# Altium PCB JLink-OB-072-Wiki.PcbDoc
Units mm, origin at the board's own origin, x right, y up, seen from the top; angles counter-clockwise.
Board outline 33.15 x 33.02 mm, 2 copper layers (Top Layer, Bottom Layer); 45 components, 32 nets, 169 pads, 75 vias.
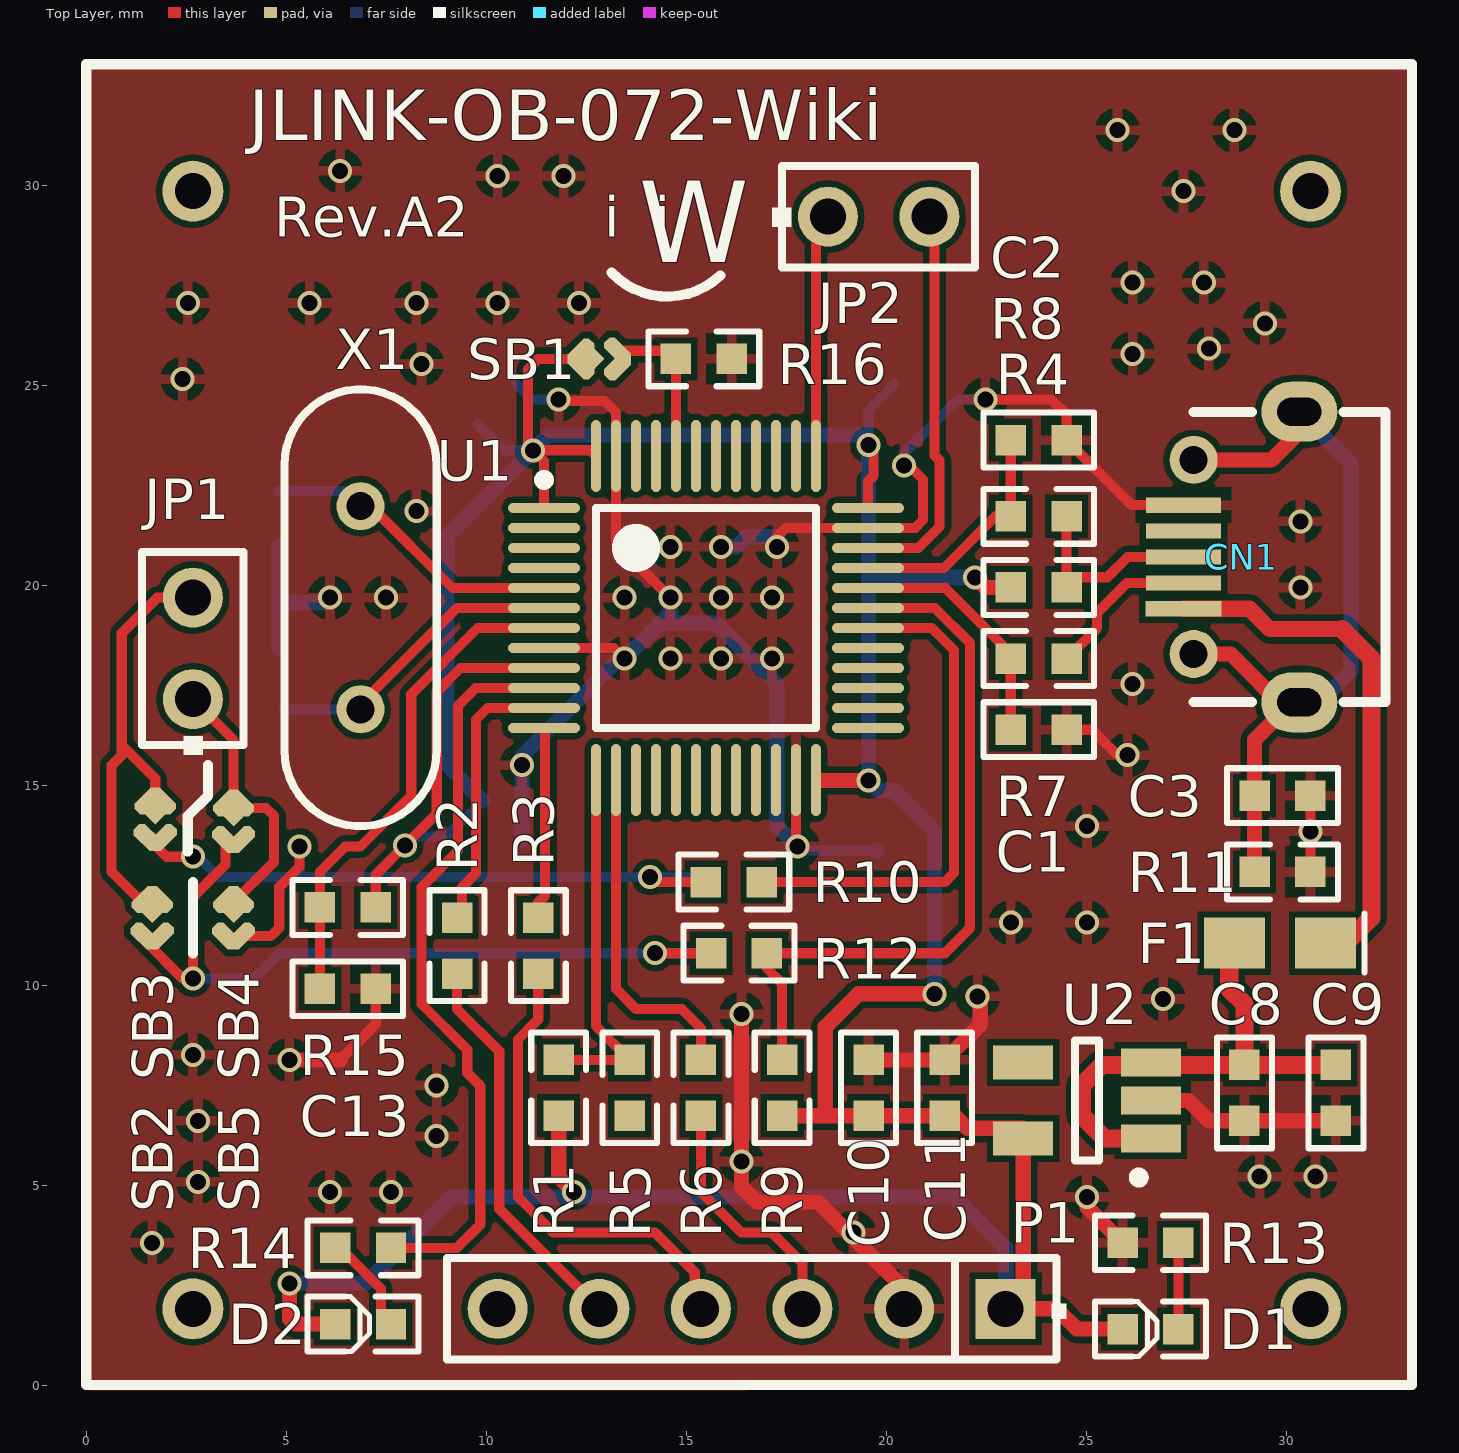
[diagram p0: Top Layer view]
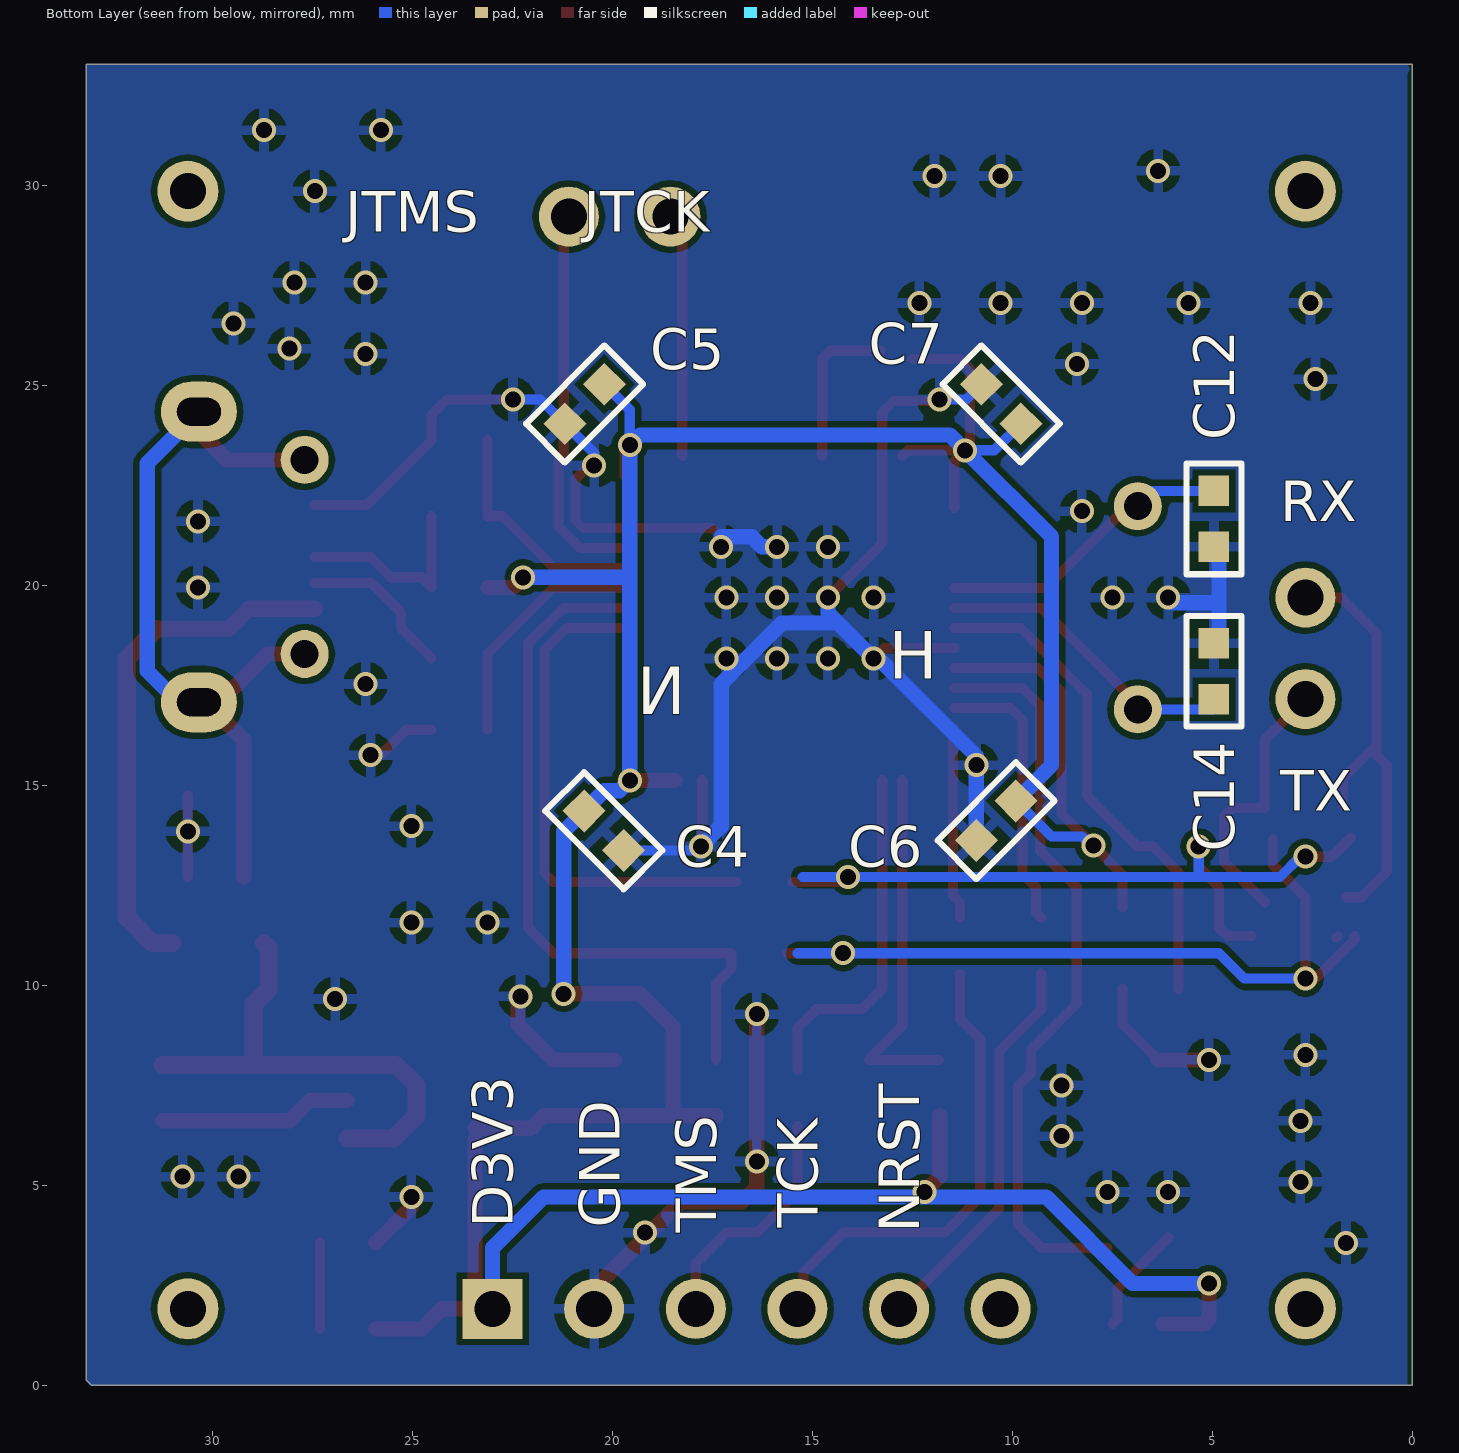
[diagram p1: Bottom Layer view, seen from below]

## Layer stack, top to bottom
Top Solder: solder mask 0.0102, Solder Resist, Dk 3.5
Top Layer: signal copper 0.0356
Dielectric1: dielectric 0.32, FR-4, Dk 4.8
Bottom Layer: signal copper 0.0356
Bottom Solder: solder mask 0.0102, Solder Resist, Dk 3.5

## Board outline
0,33.02 33.147,33.02 33.147,0.127 33.02,0 0,0

## Design rules (kind name [scope] priority, off if disabled: settings)
Clearance [All] p1: gap=0.152
PolygonConnect [All] p1: connectstyle=Relief reliefconductorwidth=0.254 reliefentries=4 polygonreliefangle="90 Angle" airgapwidth=0.254
RoomDefinition JLink-OB-072-Wiki [InComponentClass('JLink-OB-072-Wiki')] p1: confinementstyle=ConfineIn formatcopy=TRUE lockcomponents=FALSE outline 0,0 33.147,0 33.147,33.02 0,33.02
RoutingCorners [All] p1: cornerstyle=Round minsetback=2.54 maxsetback=2.54
RoutingVias [All] p1: holewidth=0.4 width=0.6 viastyle="Through Hole" minholewidth=0.4 minwidth=0.6 maxholewidth=0.4 maxwidth=0.6
SolderMaskExpansion [All] p1: expansion=0.102
Width [All] p1: maxlimit=1.27 minlimit=0.203 preferedwidth=0.254
29 further rules are at their usual default settings.

## Components (designator, comment, footprint, x,y, rotation, side; value= is the part's Value field where it differs from the comment)
C1 "Cap_0603" 0603C 24.511,16.383 r180 top
C2 "Cap_0603" 0603C 24.511,23.622 r180 top
C3 "Cap_0603" 0603C 30.607,14.732 r180 top
C4 "Cap_0603" 0603C 20.701,14.351 r225 bottom
C5 "Cap_0603" 0603C 20.193,25.019 r315 bottom
C6 "Cap_0603" 0603C 9.906,14.605 r315 bottom
C7 "Cap_0603" 0603C 9.779,24.031 r45 bottom
C8 "1uF" 0603C 28.956,6.604 r90 top
C9 "100nF" 0603C 31.242,6.604 r90 top
C10 "100nF" 0603C 19.558,8.128 r270 top
C11 "1uF" 0603C 21.463,6.731 r90 top
C12 "Cap_0603" 0603C 4.953,22.352 r270 bottom
C13 "Cap_0603" 0603C 5.842,9.906 r0 top
C14 "Cap_0603" 0603C 4.953,17.145 r90 bottom
CN1 "USB-Micro" USB_MICRO_5S_B-2 27.686,20.701 r270 top
D1 "LED_0603" LED-0603 25.908,1.397 r0 top
D2 "LED_0603" LED-0603 6.223,1.524 r0 top
F1 "500mA" 0805M 30.988,11.049 r180 top
JP1 "JP2" HDR1X2/2.54mm 2.667,17.145 r90 top
JP2 "JP2" HDR1X2/2.54mm 18.542,29.21 r0 top
P1 "Synio Power Header 6 Pin" HDR1X6/2.54MM 22.987,1.905 r180 top
R1 "Res_0603" 0603R 11.811,8.128 r270 top
R2 "Res_0603" 0603R 9.271,10.287 r90 top
R3 "Res_0603" 0603R 11.303,10.287 r90 top
R4 "Res_0603" 0603R 24.511,19.939 r180 top
R5 "Res_0603" 0603R 13.589,6.731 r90 top
R6 "Res_0603" 0603R 15.367,6.731 r90 top
R7 "Res_0603" 0603R 24.511,18.161 r180 top
R8 "Res_0603" 0603R 24.511,21.717 r180 top
R9 "Res_0603" 0603R 17.399,8.128 r270 top
R10 "Res_0603" 0603R 15.494,12.573 r0 top
R11 "Res_0603" 0603R 30.607,12.827 r180 top
R12 "Res_0603" 0603R 15.621,10.795 r0 top
R13 "Res_0603" 0603R 25.908,3.556 r0 top
R14 "Res_0603" 0603R 7.62,3.429 r180 top
R15 "Res_0603" 0603R 5.842,11.938 r0 top
R16 "Res_0603" 0603R 14.744,25.654 r0 top
SB1 "Circuit Breaker" JP2_SMD 12.827,25.654 r180 top
SB2 "Circuit Breaker" JP2_SMD 1.651,11.684 r90 top
SB3 "Circuit Breaker" JP2_SMD 1.727,14.148 r90 top
SB4 "Circuit Breaker" JP2_SMD 3.683,14.097 r90 top
SB5 "Circuit Breaker" JP2_SMD 3.683,11.684 r90 top
U1 "STM32F103C" LQFP48_N 15.494,19.177 r0 top
U2 "LDO" SOT23-5 25.019,7.112 r180 top
X1 "XTAL_5032_2P" XTAL 6.858,19.431 r90 top

## Footprints (in the part's own frame and the unit in brackets; to place one, negate y for a bottom-side part, rotate by r counter-clockwise, add the part's x,y. Pads: shape width x height; smd on the part's side, far side on the other; paste and mask are expansions set on the pad)
0603C [mil]
  rect 30x30 smd: 1(0,0) 2(55,0)
  silkscreen extent -27,-27 82,27, body extent -4,-16 59,16, height 12
0603R [mil]
  rect 30x30 smd: 1(0,0) 2(55,0)
  silkscreen extent -27,-27 82,27, body extent -4,-18 58,16, height 18
0805M [mil]
  rect 60x50 smd: 1(0,0) 2(90,0)
  silkscreen extent -38,-29 -38,29
HDR1X2/2.54mm [mm]
  round 1.5 hole 0.9: 1(0,0) 2(2.54,0)
  silkscreen extent -1.4,-1.27 3.68,1.27, body extent -1.29,-1.5 3.79,1.42, height 8.51
HDR1X6/2.54MM [mm] "Connector; Header; 6 Position"
  rect 1.5x1.5 hole 0.9: 1(0,0)
  round 1.5 hole 0.9: 2(2.54,0) 3(5.08,0) 4(7.62,0) 5(10.16,0) 6(12.7,0)
  silkscreen extent -1.52,-1.27 13.97,1.27, body extent -1.32,-1.5 13.92,1.42, height 8.51
JP2_SMD [mil]
  oct 15x30 smd rot 45: 1(-18,-8) 2(18,7)
  oct 15.75x30 smd rot 135: 1(-18,8)
  rect 26x26 smd rot 45: 2(13,0)
  oct 15x30 smd rot 135: 2(18,-7)
LED-0603 [mil]
  rect 30x30 smd: 1(0,0) 2(55,0)
  silkscreen extent -27,-27 82,27, body extent -6,-14 58,17, height 24
LQFP48_N [mm] "Thin QFP, 48-Leads, Body 7x7mm, Pitch 0.5mm, IPC Medium Density"
  oval 1.8x0.25 smd: 1(-4.05,2.75) 2(-4.05,2.25) 3(-4.05,1.75) 4(-4.05,1.25) 5(-4.05,0.75) 6(-4.05,0.25) 7(-4.05,-0.25) 8(-4.05,-0.75) 9(-4.05,-1.25) 10(-4.05,-1.75) 11(-4.05,-2.25) 12(-4.05,-2.75) 25(4.05,-2.75) 26(4.05,-2.25) 27(4.05,-1.75) 28(4.05,-1.25) 29(4.05,-0.75) 30(4.05,-0.25) 31(4.05,0.25) 32(4.05,0.75) 33(4.05,1.25) 34(4.05,1.75) 35(4.05,2.25) 36(4.05,2.75)
  oval 0.25x1.8 smd: 13(-2.75,-4.05) 14(-2.25,-4.05) 15(-1.75,-4.05) 16(-1.25,-4.05) 17(-0.75,-4.05) 18(-0.25,-4.05) 19(0.25,-4.05) 20(0.75,-4.05) 21(1.25,-4.05) 22(1.75,-4.05) 23(2.25,-4.05) 24(2.75,-4.05) 37(2.75,4.05) 38(2.25,4.05) 39(1.75,4.05) 40(1.25,4.05) 41(0.75,4.05) 42(0.25,4.05) 43(-0.25,4.05) 44(-0.75,4.05) 45(-1.25,4.05) 46(-1.75,4.05) 47(-2.25,4.05) 48(-2.75,4.05)
  silkscreen extent -4.17,-2.75 2.75,3.57, body extent -3.5,-3.5 3.5,3.5, height 1.6
SOT23-5 [mm] "Thin QFP, 48-Leads, Body 7x7mm, Pitch 0.5mm, IPC Medium Density"
  rect 1.5x0.7 smd: 1(-1.595,0.95) 2(-1.595,0) 3(-1.595,-0.95)
  rect 1.5x0.85 smd: 4(1.595,-0.95) 5(1.595,0.95)
  silkscreen extent -1.42,-1.5 0.3,2.05, body extent -1.39,-1.46 1.41,1.44, height 1.09
USB_MICRO_5S_B-2 [mil] "USB Micro SMT 5S Type B (JLC C10418)"
  oval 59.06x74.8 hole 27.56 slot 43.31 at 90 deg: 0(-143,104) 0(143,104)
  round 47.24 hole 27.5: 0(-95.5,0) 0(95.5,0)
  rect 15x75 smd: 1(51,-10)
  rect 15x74 smd: 2(25.5,-10) 3(0,-10) 4(-25.5,-10) 5(-51,-10)
  silkscreen extent -143,0 143,189, body extent -161,-9 161,204, height 105
XTAL [mm] "Radial Cap, Thru-Hole; 2 Leads; 0.2 in Pin Spacing"
  round 1.2 hole 0.7: 1(-2.54,0) 2(2.54,0)
  silkscreen extent -5.46,-1.91 5.46,1.91, body extent -5.33,-2.05 5.33,2.05, height 3.22

## Part data
C1 C2 C3 C4 C5 C6 C7 C12 C13 C14: "Capacitor"
C8 C9 C10 C11: library part Capacitor_ST, "Capacitor 0402 / 0603 / 0805"
D1 D2: "LED"
F1: library part Res, "Resistor"
R1 R2 R3 R4 R5 R6 R7 R8 R9 R10 R11 R12 R13 R14 R15 R16: "Resistor"
U1: "MCU"
U2: library part LDO-SOT23-5, "General LDO SOT23-5"
X1: "Crystal Oscillator"

## Free pads (board coordinates)
  round 1.524 hole 0.9: 0(2.667,29.845) 1(30.607,29.845) 2(30.607,1.905) 3(2.667,1.905)

## Via types
v1: diameter 0.6, hole 0.4, Top Layer to Bottom Layer, 75 vias

## Nets (pads, with @x,y where several pads share a name; then routed paths per layer and width w, separated by ;. In a path a pad name is that pad's centre, name@x,y a point inside that pad or via, vN(x,y) a via of type N, cw(c..) or ccw(c..) an arc to the next point about the centre after c; other vN are vias at no path point)
D3V3: C4.1 C5.1 C6.1 C7.1 C10.2 C11.1 D1.1 D2.1 P1.1 R1.2 R4.2 R9.2 R15.2 SB1.2 U1.1 U1.9 U1.24 U1.36 U1.48 U2.5 | length 105.4
  Top Layer w0.254: R15.2 7.239,12.76 v1(7.971,13.492) 8.763,14.284 8.763,17.332 9.358,17.927 U1.9 ; U1.1 11.444,23.1 v1(11.176,23.368) ; SB1.2@12.497,25.654 11.303,25.654 11.049,25.4 11.049,23.495 v1(11.176,23.368) ; U1.48 12.603,23.368 v1(11.176,23.368) ; U1.36 19.544,22.592 19.685,22.733 19.685,23.368 v1(19.558,23.495)
  Top Layer w0.381: v1(5.08,2.54) 5.08,1.651 5.207,1.524 D2.1 ; R1.2 11.811,5.207 v1(12.192,4.826) ; R9.2 18.479,6.731 ; 18.415,15.113 v1(19.558,15.113) ; v1(21.209,9.779) 19.304,9.779 18.479,8.954 18.479,6.731 ; v1(22.225,20.193) 22.479,19.939 R4.2 ; U2.5 23.424,2.342 P1.1 24.257,1.905 24.765,1.397 D1.1 ; U2.5@23.424,6.416 22.032,6.416 21.717,6.731 C10.2 18.479,6.731
  Bottom Layer w0.254: v1(7.971,13.492) 8.001,13.462 8.255,13.716 9.017,13.716 C6.1 ; C7.1 10.442,23.368 v1(11.176,23.368) ; v1(19.558,23.495) 19.558,24.384 C5.1
  Bottom Layer w0.381: v1(5.08,2.54) 6.985,2.54 9.144,4.699 v1@12.192,4.699 ; C6.1 9.017,15.494 9.017,21.209 v1(11.176,23.368) 11.557,23.749 19.304,23.749 v1(19.558,23.495) 19.558,20.193 ; v1(12.192,4.826) v1@12.192,4.699 ; v1(21.209,9.779) 21.209,13.843 C4.1 20.193,14.859 19.812,14.859 v1(19.558,15.113) 19.558,20.193 ; v1(22.225,20.193) 19.558,20.193 ; P1.1@22.987,2.032 22.987,3.429 21.717,4.699 v1@12.192,4.699
DM: C1.2 R7.2 U1.32 | length 6.2
  Top Layer w0.254: U1.32 21.451,19.927 21.463,19.939 23.114,18.288 R7.2 C1.2
DP: C2.2 R8.2 U1.33 | length 6
  Top Layer w0.254: U1.33 21.443,20.427 22.733,21.717 R8.2 C2.2
GND: C1.1 C2.1 C3.1 C4.2 C5.2 C6.2 C7.2 C8.1 C9.1 C10.1 C11.2 C12.2 C13.2 C14.2 CN1.5 P1.2 R11.1 R13.1 R16.2 U1.8 U1.23 U1.35 U1.47 U2.2 | length 76.8
  Top Layer w0.254: 6.35,8.128 7.239,9.017 C13.2 ; U1.8 13.196,18.427 v1(13.462,18.161) ; v1(11.811,24.638) 11.811,24.765 11.974,24.602 12.954,24.602 13.244,24.312 U1.47 13.244,21.046 v1(14.605,19.685) ; v1@17.272,21.209 17.49,21.427 U1.35 20.725,21.427 20.922,21.623 20.922,22.639 20.447,23.114 v1(20.447,22.987) ; U1.23 17.744,13.498 v1(17.78,13.462) ; v1(22.479,24.638) 24.13,24.638 24.511,24.257 C2.1 26.137,21.996 CN1.5 ; C1.1 25.146,16.383 25.781,15.748 v1(26.035,15.748) ; R11.1@30.607,12.7 v1(30.607,13.843) C3.1
  Top Layer w0.381: v1(5.08,8.128) 6.35,8.128 ; v1(16.383,9.271) 16.383,4.953 16.764,4.572 18.288,4.572 20.447,2.413 P1.2 ; 19.939,8.128 C11.2 22.352,9.017 22.352,9.652 v1(22.289,9.716) v1@22.162,9.716 ; v1(25.019,4.699) 25.019,4.445 R13.1 ; U2.2 27.559,7.112 28.067,6.604 C8.1 C9.1
  Bottom Layer w0.254: C7.2 11.148,24.638 v1(11.811,24.638) ; v1(17.78,13.462) 17.879,13.363 C4.2 ; v1(20.447,22.987) 20.447,23.297 C5.2 21.788,24.638 v1(22.479,24.638)
  Bottom Layer w0.381: C14.2@4.826,18.415 4.826,19.558 ; C12.2@4.826,20.955 4.826,19.558 ; v1(6.096,19.685) 5.969,19.558 4.826,19.558 ; C6.2 10.894,15.72 13.335,18.161 v1(13.462,18.161) 14.351,19.05 ; v1(14.605,19.685) 14.605,19.304 14.351,19.05 ; v1@16.002,20.955 16.256,20.955 16.51,21.209 v1@17.272,21.209 ; v1(17.78,13.462) 17.272,13.97 17.272,17.526 15.748,19.05 14.351,19.05 ; C4.2 C4.2@19.784,13.363
  other v1: 1.651,3.556 19.177,3.81 6.096,4.826 7.62,4.826 2.794,5.08 29.337,5.207 30.734,5.207 16.383,5.588 8.763,6.223 2.794,6.604 8.763,7.493 2.667,8.255 26.924,9.652 23.114,11.557 25.019,11.557 25.019,13.97 10.894,15.494 26.162,17.526 14.605,18.161 15.875,18.161 17.145,18.161 7.493,19.685 13.462,19.685 15.875,19.685 17.145,19.685 30.353,19.939 14.605,20.955 15.875,20.955 17.272,20.955 30.353,21.59 8.255,21.844 2.413,25.146 8.382,25.527 26.162,25.781 28.067,25.908 29.464,26.543 2.54,27.051 5.588,27.051 8.255,27.051 10.287,27.051 12.319,27.051 26.162,27.559 27.94,27.559 27.432,29.845 10.287,30.226 11.938,30.226 6.35,30.353 25.781,31.369 28.702,31.369
JTCK: JP2.1 U1.37 | length 6.1
  Top Layer w0.254: U1.37 18.244,28.912 JP2.1
JTMS: JP2.2 U1.34 | length 10
  Top Layer w0.254: U1.34 20.8,20.927 21.336,21.463 21.336,23.114 21.209,23.241 21.209,28.575 21.082,28.702 JP2.2 JP2.2@21.082,29.337
LED: R14.1 U1.10 | length 18.8
  Top Layer w0.254: R14.1 9.271,3.429 9.85,4.008 9.85,7.479 9.525,7.804 9.525,8.382 8.382,9.525 8.382,12.446 9.296,13.36 9.296,16.983 9.74,17.427 U1.10
NetC3_2: C3.2 CN1.0 R11.2 | length 19
  Top Layer w0.381: CN1.0@27.686,18.275 28.613,18.275 29.985,16.904 29.21,16.129 29.21,14.605 R11.2@29.21,12.7 ; CN1.0@27.686,23.127 29.629,23.127 CN1.0@30.328,23.825
  Bottom Layer w0.381: CN1.0@30.328,17.069 30.836,17.069 31.623,17.856 31.623,23.038 CN1.0@30.328,24.333
NetC12_1: C12.1 U1.5 X1.2 | length 7.6
  Top Layer w0.254: X1.2 7.112,21.971 9.156,19.927 U1.5
  Bottom Layer w0.254: C12.1@4.826,22.352 C12.1 6.477,22.352 X1.2
NetC14_1: C14.1 U1.6 X1.1 | length 7.6
  Top Layer w0.254: X1.1 6.858,17.018 9.267,19.427 U1.6
  Bottom Layer w0.254: C14.1@4.953,16.891 X1.1
NetCN1_1: CN1.1 F1.1 | length 13.1
  Top Layer w0.406: CN1.1 29.083,19.406 29.591,18.898 31.394,18.898
  Top Layer w0.457: F1.1 31.496,11.049 32.131,11.684 32.131,18.161 31.394,18.898
NetCN1_2: CN1.2 R7.1 | length 3.9
  Top Layer w0.254: R7.1 25.273,18.923 25.273,19.304 26.022,20.053 CN1.2
NetCN1_3: CN1.3 R4.1 R8.1 | length 5
  Top Layer w0.254: R8.1 R4.1 24.765,20.193 25.527,20.193 26.035,20.701 CN1.3
NetD1_2: D1.2 R13.2 | length 2.2
  Top Layer w0.254: D1.2 R13.2
NetD2_2: D2.2 R14.2 | length 2.7
  Top Layer w0.254: R14.2@6.096,3.683 7.366,2.413 7.366,1.651 D2.2@7.493,1.524
NetJP1_1: JP1.1 SB4.2 SB5.2 | length 6.8
  Top Layer w0.254: JP1.1 3.683,16.129 3.683,14.427 4.496,14.427 4.699,14.224 4.699,13.081 SB5.2@3.683,12.065
NetJP1_2: JP1.2 SB2.2 SB3.2 | length 11.4
  Top Layer w0.254: SB2.2@1.651,12.192 1.27,12.192 0.635,12.827 0.635,15.494 0.889,15.748 0.889,16.002 ; SB3.2@1.727,14.478 1.727,15.164 0.889,16.002 ; JP1.2 1.778,19.685 0.889,18.796 0.889,16.002
NetR1_1: R1.1 R5.2 U1.13 | length 9.1
  Top Layer w0.254: R1.1 R5.2 12.744,8.973 U1.13
NetR2_2: R2.2 U1.11 | length 7
  Top Layer w0.254: R2.2 9.398,11.811 9.398,12.446 9.743,12.791 9.743,16.637 10.033,16.927 U1.11
NetR3_2: R3.2 U1.12 | length 4.8
  Top Layer w0.254: R3.2 11.303,12.065 11.473,12.235 11.473,16.398 U1.12
NetR6_2: R6.2 U1.14 | length 8.8
  Top Layer w0.254: U1.14 13.244,9.906 13.752,9.398 14.895,9.398 15.367,8.926 R6.2 R6.2@15.367,7.874
NetR9_1: R9.1 R12.2 U1.31 | length 18.2
  Top Layer w0.254: R9.1 17.399,10.033 17.018,10.414 R12.2 21.463,10.795 22.098,11.43 22.098,18.542 21.213,19.427 U1.31
NetR10_2: R10.2 U1.30 | length 12.8
  Top Layer w0.254: R10.2 21.463,12.573 21.692,12.802 21.692,18.374 21.138,18.927 U1.30
NetR16_1: R16.1 SB1.1 U1.44 | length 4
  Top Layer w0.254: SB1.1@13.284,25.857 14.541,25.857 R16.1 U1.44
RST: C13.1 R15.1 U1.7 | length 12.5
  Top Layer w0.254: C13.1 R15.1 5.842,12.827 6.477,13.462 6.858,13.462 8.128,14.732 8.128,17.272 9.783,18.927 U1.7
RXD: R12.1 SB2.1 SB4.1 | length 20
  Top Layer w0.254: SB2.1@1.448,11.227 1.448,11.125 2.413,10.16 v1(2.667,10.16) 2.667,12.192 3.48,13.005 SB4.1@3.48,13.64 ; SB2.1@1.854,11.227 SB2.1@1.905,11.176 ; v1(14.224,10.795) R12.1
  Bottom Layer w0.254: v1(2.667,10.16) 4.191,10.16 4.826,10.795 15.367,10.795
SWCLK: P1.4 R3.1 | length 11.4
  Top Layer w0.254: R3.1 11.303,9.144 10.795,8.636 10.795,4.699 11.684,3.81 14.224,3.81 15.215,2.819 P1.4@15.215,2.454
SWDIO: P1.3 R6.1 | length 6.1
  Top Layer w0.254: R6.1@15.367,6.477 15.367,4.826 16.383,3.81 17.145,3.81 17.907,3.048 P1.3
SWO/TDO: R5.1
TRST: P1.5 R2.1 | length 9.9
  Top Layer w0.254: R2.1 9.271,9.398 10.325,8.344 10.325,4.407 P1.5
TXD: R10.1 SB3.1 SB5.1 | length 19.7
  Top Layer w0.254: SB3.1@1.524,13.691 2.007,13.208 v1(2.667,13.208) ; SB5.1@4.013,11.227 4.623,11.227 4.826,11.43 4.826,12.446 5.334,12.954 v1(5.334,13.462) ; v1(14.097,12.7) 13.97,12.573 R10.1
  Bottom Layer w0.254: v1(2.667,13.208) 2.794,13.208 3.302,12.7 5.334,12.7 ; v1(5.334,13.462) 5.334,12.7 ; 15.24,12.7 5.334,12.7
U5V: C8.2 C9.2 F1.2 U2.1 U2.3 | length 12.5
  Top Layer w0.457: U2.1 25.461,6.162 24.892,6.731 24.892,7.493 25.4,8.001 C8.2 ; F1.2 28.575,10.922 28.575,9.906 28.956,9.525 C8.2 ; C9.2 C8.2
pads on no net: CN1.4 P1.6 U1.2 U1.3 U1.4 U1.15 U1.16 U1.17 U1.18 U1.19 U1.20 U1.21 U1.22 U1.25 U1.26 U1.27 U1.28 U1.29 U1.38 U1.39 U1.40 U1.41 U1.42 U1.43 U1.45 U1.46 U2.4

## Polygon pours and split planes (outlines as drawn)
GND on Top Layer "bl" (solid, remove dead copper, pour order 6): 0.127,32.893 0.635,33.02 33.147,33.02 33.147,-0.127 33.02,0 16.51,-0.127 0,-0.127
GND on Bottom Layer "bl" (solid, remove dead copper, pour order 8): 0.127,0 33.147,0 33.147,33.02 0.381,33.02 0,33.02 0.127,32.766

## Silkscreen, mask and mechanical layers (free items; w line width, h text height)
Top Overlay:
  lines w0.254: 2.54,13.335 2.54,14.224 3.048,14.732 3.048,15.494 ; 2.667,10.795 2.667,12.573 ; 13.132,27.813 ccw(c14.529,29.134) 15.85,27.737 ; 0,0 0,33.02 33.147,33.02 33.147,0 0,0
  text "JLINK-OB-072-Wiki" at 4.064,31.115 h1.27
  text "Rev.A2" at 4.699,28.702 h1
  text "i  i" at 12.954,28.702 h1.02
  text "W" at 13.818,28.067 h2.03
Bottom Overlay:
  text "JTMS      JTCK" at 26.67,28.829 h1.02
  text "RX" at 3.302,21.59 h1.02
  text "H" at 13.081,17.272 h2.03
  text "N" at 18.161,16.383 h2.03
  text "TX" at 3.302,14.351 h1.02
  text "TCK" at 14.859,3.937 h1.02 r270
  text "GND" at 19.812,3.937 h1.02 r270
  text "D3V3" at 22.479,3.937 h1.02 r270
  text "NRST" at 12.319,3.81 h1.02 r270
  text "TMS" at 17.399,3.81 h1.02 r270